# Altium PCB Aux_BNO055.PcbDoc
Units mil, origin at the board's own origin, x right, y up, seen from the top; angles counter-clockwise.
Board outline 475 x 450 mil, 4 copper layers (Top Layer, GND, VCC, Bottom Layer), stack 30.634 mil thick; 10 components, 10 nets, 49 pads, 14 vias.
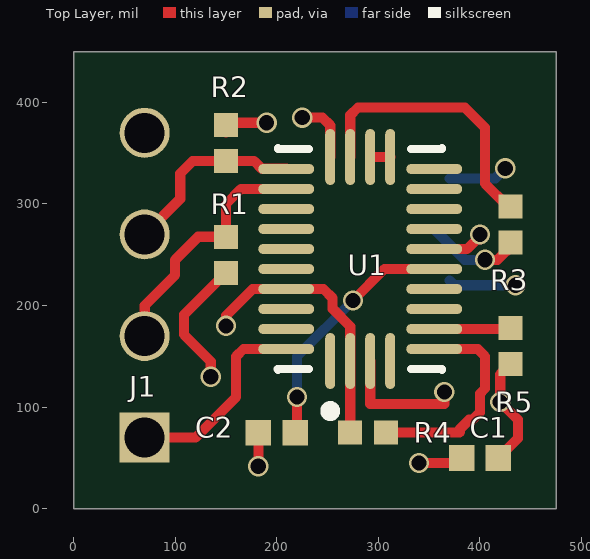
[diagram p0: Top Layer view]
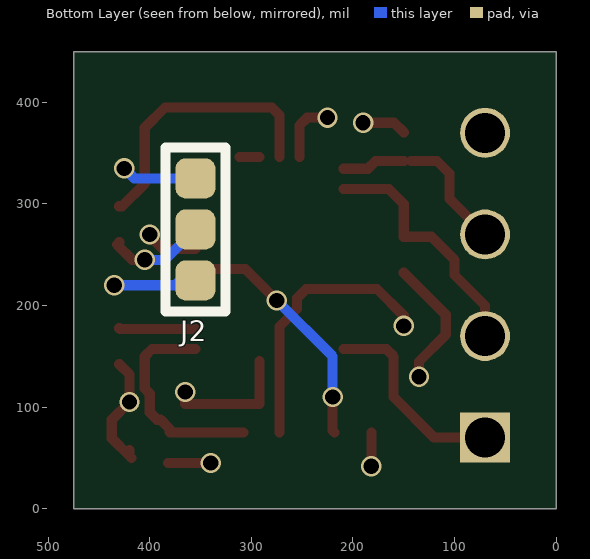
[diagram p1: Bottom Layer view, seen from below]
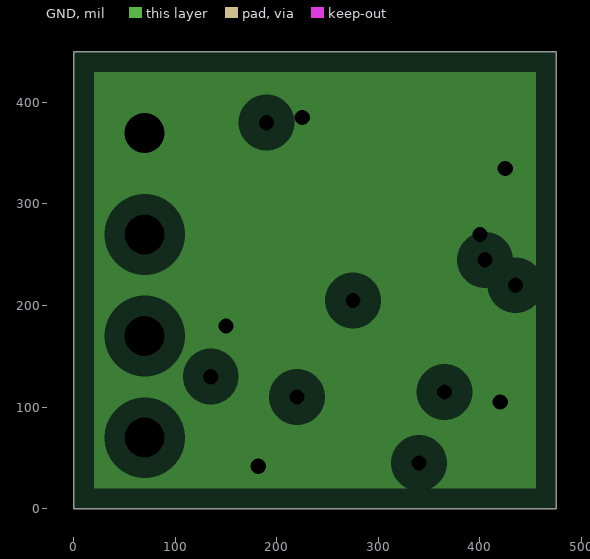
[diagram p2: GND, clearances drawn from the general rule]
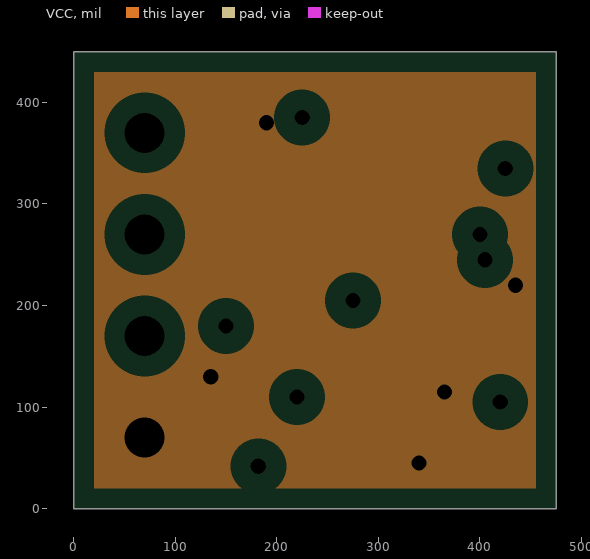
[diagram p3: VCC, clearances drawn from the general rule]

## Layer stack, top to bottom
Top Solder: solder mask 0.4, Solder Resist, Dk 3.5
Top Layer: signal copper 1.4
Dielectric 1: core 10, FR-4, Dk 4.2
GND: plane copper 1.417, net GND
Dielectric 3: prepreg 5, Dk 4.2
VCC: plane copper 1.417, net VCC
Dielectric 2: core 10, Dk 4.2
Bottom Layer: signal copper 1.4
Bottom Solder: solder mask 0.4, Solder Resist, Dk 3.5

## Board outline
0,0 0,450 475,450 475,0

## Design rules (kind name [scope] priority, off if disabled: settings)
Clearance [All] p1: gap=5
ComponentClearance [All] p1: gap=5 collisioncheckmode=3 verticalgap=5 showdistances=FALSE
PlaneClearance [All] p1: clearance=20
PlaneConnect [All] p1: planeconnectstyle=Relief reliefexpansion=20 reliefentries=4 reliefconductorwidth=10 reliefairgap=10
PolygonConnect [All] p1: connectstyle=Relief reliefconductorwidth=10 reliefentries=4 polygonreliefangle="90 Angle" airgapwidth=10
RoomDefinition bno_aux [InComponentClass('bno_aux')] p1 off: confinementstyle=ConfineIn formatcopy=TRUE lockcomponents=FALSE outline 65,1385 1535,1385 1535,1900 65,1900
RoutingVias [All] p1: holewidth=15 width=20 viastyle="Through Hole" minholewidth=15 minwidth=10 maxholewidth=28 maxwidth=50
SilkToSilkClearance [All] p1: silktosilkclearance=2
SilkToSolderMaskClearance [IsPad] p1: minsilkscreentomaskgap=2 clearancetoexposedcopper=TRUE
SolderMaskExpansion [All] p1 off: expansion=0
Width [All] p1: maxlimit=10 minlimit=10 preferedwidth=10
25 further rules are at their usual default settings.

## Components (designator, comment, footprint, x,y, rotation, side; value= is the part's Value field where it differs from the comment)
C1 "885012205037" CAPC0402N 400,50 r0 top
C2 "885012205037" CAPC0402N 200,75 r180 top
J1 "HEADER 4/SM" 61900411021 70,70 r90 top
J2 "Header 3H" SolderJumper 355,275 r90 bottom
R1 "10k" RESC402N 150,250 r90 top
R2 "10k" RESC402N 150,360 r270 top
R3 "10k" RESC402N 430,280 r270 top
R4 "10k" RESC402N 290,75 r0 top
R5 "10k" RESC402N 430,160 r90 top
U1 "BNO055" LCCS50P520X380X118-28N 282.17,245.79 r90 top

## Footprints (in the part's own frame and the unit in brackets; to place one, negate y for a bottom-side part, rotate by r counter-clockwise, add the part's x,y. Pads: shape width x height; smd on the part's side, far side on the other; paste and mask are expansions set on the pad)
61900411021 [mm] "4 Positions Header Connector 0.100\" (2.54mm) Through Hole, Right Angle Tin"
  rect 1.25x1.25 hole 1: 1(0,0)
  round 1.25 hole 1: 2(2.54,0) 3(5.08,0) 4(7.62,0)
  body extent -1.28,-0.28 8.88,13.24, height 5.9
CAPC0402N [mm] "Chip Capacitor, 2-Leads, Body 1.00x0.50mm, IPC Medium Density"
  rect 0.64x0.64 smd: 1(-0.46,0) 2(0.46,0)
  body extent -0.55,-0.3 0.55,0.3, height 0.6
LCCS50P520X380X118-28N [mm] "LCC, 28-Pins, Body 5.20x3.80mmx1.18mm, Pitch 0.50mm, IPC Medium Density"
  oval 1.4x0.25 smd: 1(-2.55,0.75) 2(-2.55,0.25) 3(-2.55,-0.25) 4(-2.55,-0.75) 15(2.55,-0.75) 16(2.55,-0.25) 17(2.55,0.25) 18(2.55,0.75)
  oval 0.25x1.4 smd: 5(-2.25,-1.85) 6(-1.75,-1.85) 7(-1.25,-1.85) 8(-0.75,-1.85) 9(-0.25,-1.85) 10(0.25,-1.85) 11(0.75,-1.85) 12(1.25,-1.85) 13(1.75,-1.85) 14(2.25,-1.85) 19(2.25,1.85) 20(1.75,1.85) 21(1.25,1.85) 22(0.75,1.85) 23(0.25,1.85) 24(-0.25,1.85) 25(-0.75,1.85) 26(-1.25,1.85) 27(-1.75,1.85) 28(-2.25,1.85)
  silkscreen extent -3.92,-2.05 2.78,2.06, body extent -2.53,-1.95 2.47,2.05, height 0.92
RESC402N [mm] "Chip Resistor, 2-Leads, Body 1.00x0.50mm, IPC Medium Density"
  rect 0.6x0.6 smd: 1(-0.45,0) 2(0.45,0)
  body extent -0.55,-0.3 0.55,0.3, height 0.4
SolderJumper [mm] "3 pos solder Jumper"
  rrect50% 1x1 smd: 1(-1.275,0) 2(0,0) 3(1.275,0)
  silkscreen extent -2.05,-0.75 2.05,0.75

## Part data
C1 C2: "CAP, CERM, 0.1 µF, 16 V, +/- 10%, X7R, 0402"
J2: "Header, 3-Pin, Right Angle"
R1 R2 R3 R4 R5: library part RC0402FR-0710KL, "RES SMD 10K OHM 1% 1/16W 0402"

## Via types
v1: diameter 20, hole 15, Top Layer to Bottom Layer, tented both sides, 10 vias
v2: diameter 20, hole 15, Top Layer to Bottom Layer, 4 vias

## Nets (pads, with @x,y where several pads share a name; then routed paths per layer and width w, separated by ;. In a path a pad name is that pad's centre, name@x,y a point inside that pad or via, vN(x,y) a via of type N, cw(c..) or ccw(c..) an arc to the next point about the centre after c; other vN are vias at no path point)
D0: J1.2 R1.2 U1.20 | length 244.5
  Top Layer w10: J1.2 70,200 100,230 100,245 122.72,267.72 R1.2 150,300 164.68,314.68 U1.20
D1: J1.3 R2.2 U1.19 | length 179.8
  Top Layer w10: J1.3 105,305 105,330 117.28,342.28 R2.2@142.72,342.28 ; R2.2 177.72,342.28 185.32,334.68 U1.19@209.33,334.68
GND: C1.2 C2.2 J1.4 J2.3 R4.1 R5.1 U1.2 U1.10 U1.18 U1.25 | length 599.4
  Top Layer w10: v1(150,180) 150,190 176.26,216.26 U1.25 246,216.26 255,207.26 255,196.72 272.32,179.39 U1.2 U1.2 R4.1 ; v2(181.89,41.89) C2.2 ; v1(225,385) 245,385 252.64,377.36 U1.18 ; U1.10 387.35,255.63 396.72,265 400,265 v1(400,270) ; C1.2 C1.2@420,51.89 ; C1.2@420,57.6 C1.2@420,51.89 ; v1@420,335 v1(425,335) ; R5.1 420,132.28 v1(420,105) 437.4,87.6 437.4,69.29 C1.2@420,51.89
  Bottom Layer w10: J2.3@370,325.2 415.2,325.2 v1(425,335)
NetC2_1: C2.1 U1.9 | length 246.4
  Top Layer w10: C2.1 220,76.89 v2(220,110) ; v2(275,205) 305.94,235.94 U1.9
  Bottom Layer w10: v2(220,110) 220,150 v2(275,205)
NetJ2_2: J2.2 R3.2 | length 99.2
  Top Layer w10: v1(405,245) 417.28,245 432.28,260 R3.2
  Bottom Layer w10: J2.2 385,245 v1(405,245)
NetR3_1: R3.1 U1.17 | length 274.5
  Top Layer w10: U1.17 272.32,387.32 280,395 385,395 405,375 405,320 427.28,297.72 R3.1
NetR4_2: R4.2 U1.5 | length 212.6
  Top Layer w10: R4.2 380,75 380.51,75.51 380.51,78.81 389.3,87.6 392.6,87.6 400,95 400,113.28 405,118.28 405,150 397.8,157.2 U1.5
NetR5_2: R5.2 U1.6 | length 75.3
  Top Layer w10: U1.6 429.17,176.89 R5.2
NetU1_15: U1.15 U1.16 | length 19.7
  Top Layer w10: U1.16 U1.15
VCC: C1.1 J1.1 J2.1 R1.1 R2.1 U1.3 U1.28 | length 609.5
  Top Layer w10: J1.1 120,70 160,110 160,150 167.2,157.2 U1.28 ; v1(135,130) 135,145 108.62,171.38 108.62,190.91 R1.1 ; R2.1@150,370.43 159.57,380 v1(190,380) ; U1.3 292.01,102.99 365,102.99 v1(365,115) ; v2(340,45) C1.1@381.89,45
  Bottom Layer w10: J2.1@370,224.8 374.8,220 v1(435,220)
pads on no net: U1.1 U1.4 U1.7 U1.8 U1.11 U1.12 U1.13 U1.14 U1.21 U1.22 U1.23 U1.24 U1.26 U1.27

## Polygon pours and split planes (outlines as drawn)
GND on GND (split plane): 454.9,20.1 20.1,20.1 20.1,429.9 454.9,429.9
VCC on VCC (split plane): 454.9,20.1 20.1,20.1 20.1,429.9 454.9,429.9

## Silkscreen, mask and mechanical layers (free items; w line width, h text height)
Board Outline:
  the board outline again, w10